# Altium PCB BaseCircuit.PcbDoc
Units mil, origin at the board's own origin, x right, y up, seen from the top; angles counter-clockwise.
Board outline 6000 x 4000 mil, 2 copper layers (Top Layer, Bottom Layer); 21 components, 10 nets, 205 pads, 0 vias.
Unrouted connection lines stored in the file: 26.
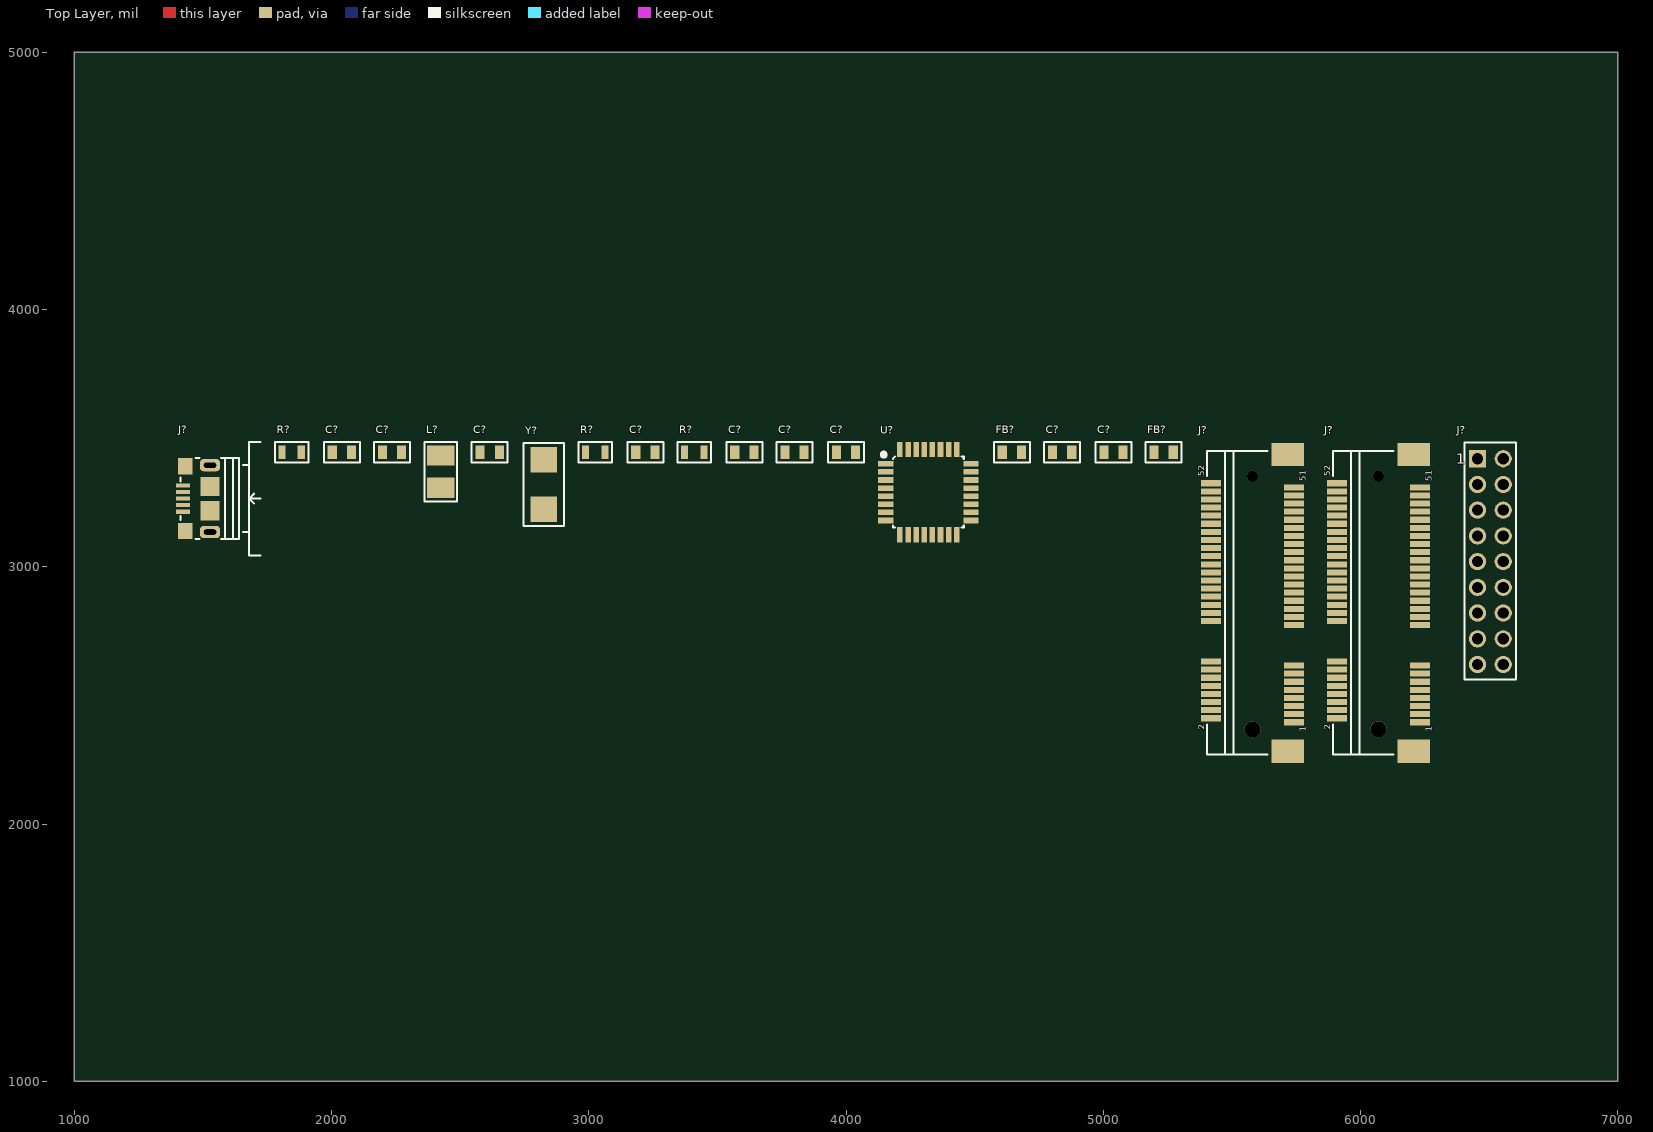
[diagram p0: Top Layer view]
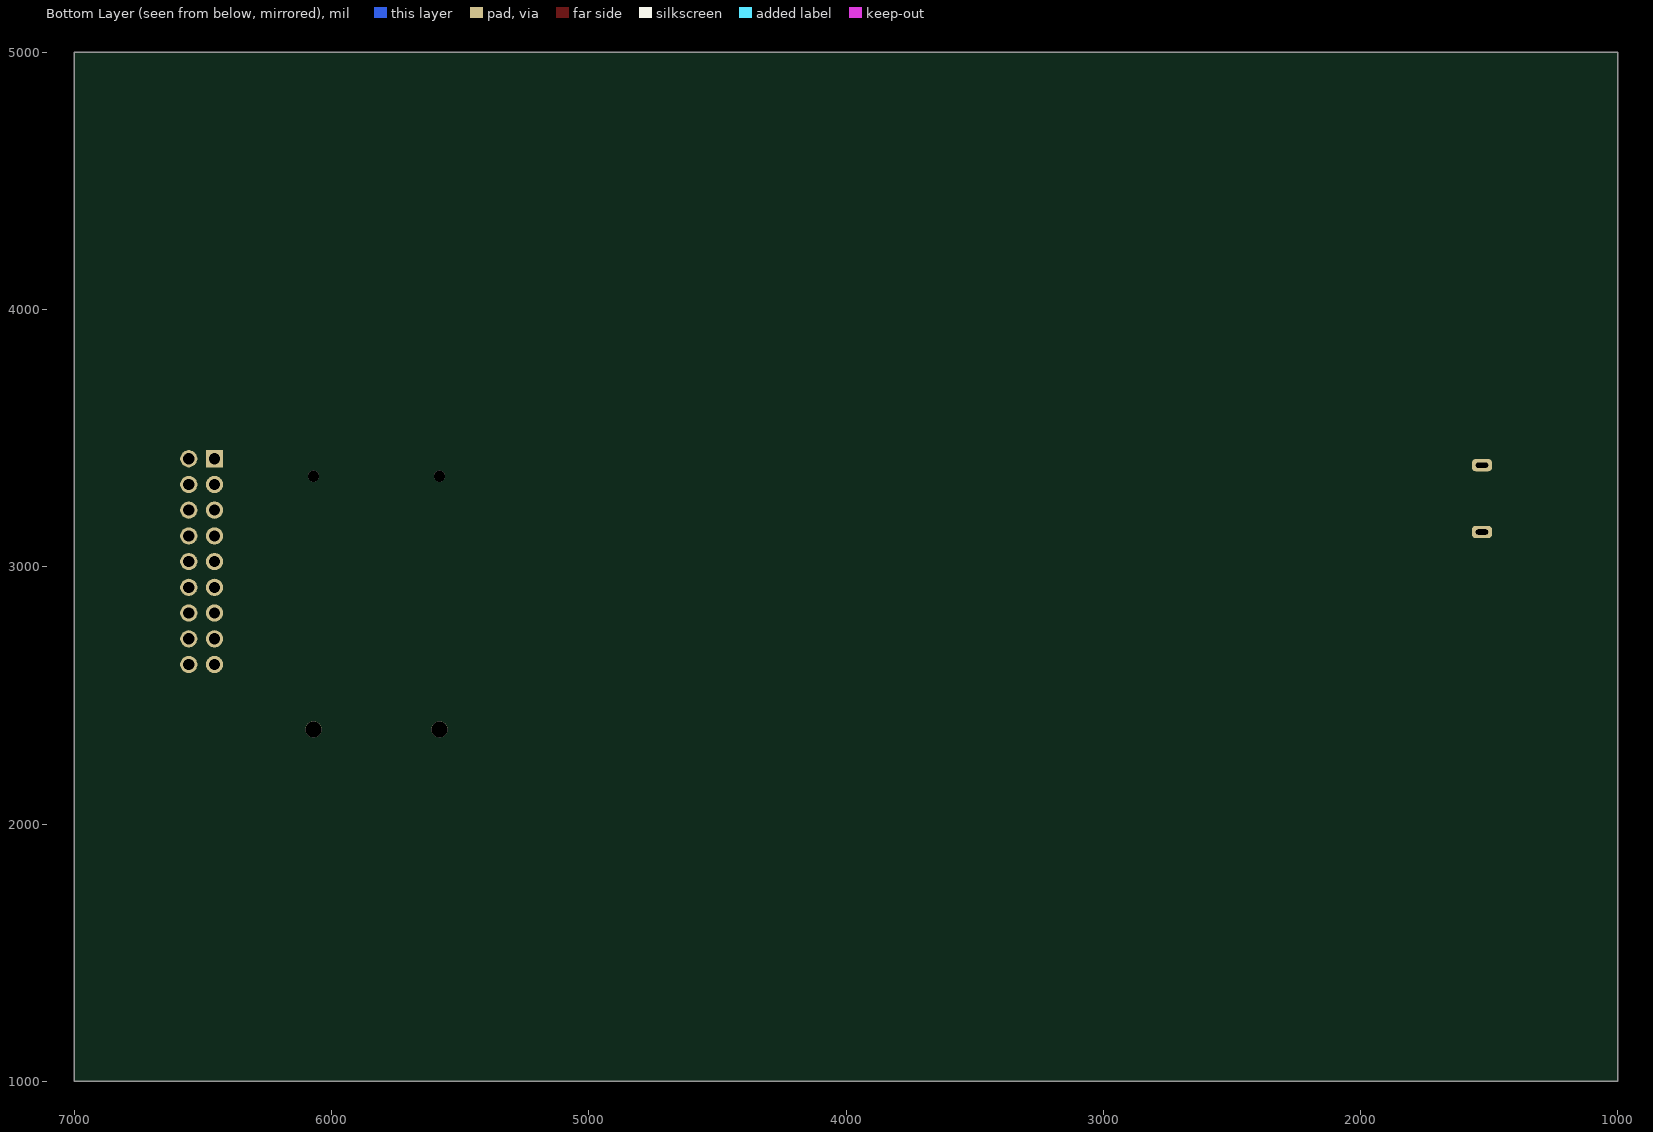
[diagram p1: Bottom Layer view, seen from below]

## Layer stack, top to bottom
Top Solder: solder mask 0.4, Solder Resist, Dk 3.5
Top Layer: signal copper 1.4
Dielectric 1: dielectric 12.6, FR-4, Dk 4.8
Bottom Layer: signal copper 1.4
Bottom Solder: solder mask 0.4, Solder Resist, Dk 3.5

## Board outline
1000,1000 7000,1000 7000,5000 1000,5000

## Design rules (kind name [scope] priority, off if disabled: settings)
Clearance [All] p1: gap=10 ignorepadtopadclearanceinfootprint=FALSE except(0: Arc-Hole Track-Hole SMDPad-Hole THPad-Hole Via-Hole Fill-Hole Poly-Hole Region-Hole Text-Hole)
PolygonConnect [All] p1: connectstyle=Relief reliefconductorwidth=10 reliefentries=4 polygonreliefangle="90 Angle" airgapwidth=10
RoutingVias [All] p1: holewidth=28 width=50 viastyle="Through Hole" minholewidth=28 minwidth=50 maxholewidth=28 maxwidth=50
SolderMaskExpansion [All] p1: expansion=4 istentingtop=FALSE
Width [All] p1: maxlimit=10 minlimit=10 preferedwidth=10
30 further rules are at their usual default settings.

## Components (designator, comment, footprint, x,y, rotation, side; value= is the part's Value field where it differs from the comment)
C? "10uF" C0805 4840,3445 r0 top
C? "10uF" C0805 4000,3445 r0 top
C? "100uF" C0805 2040,3445 r0 top
C? "10uF" C0805 3800,3445 r0 top
C? "18pF" C0805 2615,3445 r0 top
C? "100nF" C0805 5040,3445 r0 top
C? "18pF" C0805 3220,3445 r0 top
C? "100nF" C0805 3605,3445 r0 top
C? "100uF" C0805 2235,3445 r0 top
FB? "MPZ2012S601AT000" C0805 5235,3445 r0 top
FB? "MPZ2012S601AT000" C0805 4645,3445 r0 top
J? "PPTC092LFBN-RC" HDR_2X9_2.54MM 6455,3420 r0 top
J? "1775862-2" TE_1775862-2 5580,2860 r90 top
J? "1775862-2" TE_1775862-2 6070,2860 r90 top
J? "10118193-0001LF" 10118193-0001LF 1475,3265 r90 top
L? "2U2/2A" CL_inductor 2425,3370 r90 top
R? "0R" R0805 1845,3445 r0 top
R? "10K" R0805 3410,3445 r0 top
R? "1M" R0805 3025,3445 r0 top
U? "ATMEGA328PB-AU" TQFP_32 4320,3290 r0 top
Y? "ABM7-16.000MHZ-D2Y-T" ABM4_v1_1_BIG 2825,3320 r90 top

## Footprints (in the part's own frame and the unit in brackets; to place one, negate y for a bottom-side part, rotate by r counter-clockwise, add the part's x,y. Pads: shape width x height; smd on the part's side, far side on the other; paste and mask are expansions set on the pad)
10118193-0001LF [mm]
  rect 0.4x1.35 smd mask+0.05: 1(-1.3,1.338) 2(-0.65,1.338) 3(0,1.338) 4(0.65,1.338) 5(1.3,1.338)
  rect 1.6x1.4 smd: 6(-3.2,1.112) 7(3.2,1.112)
  rrect60% 1.2x2 hole 0.5 slot 1.2 at 90 deg mask+0.05: 8(-3.3,-1.338) 9(3.3,-1.338)
  rect 1.9x1.9 smd: 10(-1.2,-1.338) 11(1.2,-1.338)
  silkscreen extent -5.6,-6.3 5.6,1.6, body extent -3.93,-4.2 3.93,1.58, height 2.88
ABM4_v1_1_BIG [mm]
  rect 2.5x2.6 smd: 1(-2.45,0) 2(2.45,0)
  silkscreen extent -4.1,-2 4.1,2, body extent -3.1,-1.85 3.1,1.85, height 1.41
C0805 [mm]
  rect 0.9x1.3 smd: 1(-0.95,0) 2(0.95,0)
  silkscreen extent -1.78,-1.02 1.78,1.02, body extent -1.15,-0.51 1.15,0.49, height 1.53
CL_inductor [mm]
  rect 2x2.7 smd: 1(-1.6,0) 2(1.6,0)
  silkscreen extent -2.95,-1.6 2.9,1.6, body extent -1.7,-1.25 1.7,1.25, height 2.7
HDR_2X9_2.54MM [mm]
  rect 1.7x1.7 hole 1.1: 1(0,0)
  round 1.7 hole 1.1: 2(0,-2.54) 3(0,-5.08) 4(0,-7.62) 5(0,-10.16) 6(0,-12.7) 7(0,-15.24) 8(0,-17.78) 9(0,-20.32) 10(2.54,-20.32) 11(2.54,-17.78) 12(2.54,-15.24) 13(2.54,-12.7) 14(2.54,-10.16) 15(2.54,-7.62) 16(2.54,-5.08) 17(2.54,-2.54) 18(2.54,0)
  silkscreen extent -1.3,-21.8 3.8,1.6, body extent -1.3,-21.77 3.78,1.6, height 8.51
R0805 [mm]
  rect 0.7x1.3 smd: 1(-0.95,0) 2(0.95,0)
  silkscreen extent -1.65,-1.02 1.65,1.02, body extent -1,-0.6 1,0.6, height 0.7
TE_1775862-2 [mm]
  rect 0.6x2 smd: 1(-11.8,-4.1) 2(-11.4,4.1) 3(-11,-4.1) 4(-10.6,4.1) 5(-10.2,-4.1) 6(-9.8,4.1) 7(-9.4,-4.1) 8(-9,4.1) 9(-8.6,-4.1) 10(-8.2,4.1) 11(-7.8,-4.1) 12(-7.4,4.1) 13(-7,-4.1) 14(-6.6,4.1) 15(-6.2,-4.1) 16(-5.8,4.1) 17(-2.2,-4.1) 18(-1.8,4.1) 19(-1.4,-4.1) 20(-1,4.1) 21(-0.6,-4.1) 22(-0.2,4.1) 23(0.2,-4.1) 24(0.6,4.1) 25(1,-4.1) 26(1.4,4.1) 27(1.8,-4.1) 28(2.2,4.1) 29(2.6,-4.1) 30(3,4.1) 31(3.4,-4.1) 32(3.8,4.1) 33(4.2,-4.1) 34(4.6,4.1) 35(5,-4.1) 36(5.4,4.1) 37(5.8,-4.1) 38(6.2,4.1) 39(6.6,-4.1) 40(7,4.1) 41(7.4,-4.1) 42(7.8,4.1) 43(8.2,-4.1) 44(8.6,4.1) 45(9,-4.1) 46(9.4,4.1) 47(9.8,-4.1) 48(10.2,4.1) 49(10.6,-4.1) 50(11,4.1) 51(11.4,-4.1) 52(11.8,4.1)
  rect 2.3x3.2 smd: P1(-14.65,-3.5) P2(14.65,-3.5)
  round 1.6 hole 1.6 unplated: ""(-12.5,0)
  round 1.1 hole 1.1 unplated: ""(12.5,0)
  silkscreen extent -15,-1.5 15,4.5, body extent -14.85,-4.58 15.05,4.5, height 5.15
TQFP_32 [mm]
  rect 1.5x0.55 smd mask+0.06: 1(-4.2,2.8) 2(-4.2,2) 3(-4.2,1.2) 4(-4.2,0.4) 5(-4.2,-0.4) 6(-4.2,-1.2) 7(-4.2,-2) 8(-4.2,-2.8) 17(4.2,-2.8) 18(4.2,-2) 19(4.2,-1.2) 20(4.2,-0.4) 21(4.2,0.4) 22(4.2,1.2) 23(4.2,2) 24(4.2,2.8)
  rect 0.55x1.5 smd mask+0.06: 9(-2.8,-4.2) 10(-2,-4.2) 11(-1.2,-4.2) 12(-0.4,-4.2) 13(0.4,-4.2) 14(1.2,-4.2) 15(2,-4.2) 16(2.8,-4.2) 25(2.8,4.2) 26(2,4.2) 27(1.2,4.2) 28(0.4,4.2) 29(-0.4,4.2) 30(-1.2,4.2) 31(-2,4.2) 32(-2.8,4.2)
  silkscreen extent -4.54,-3.5 3.5,3.84, body extent -4.6,-4.6 4.6,4.6, height 1.2

## Part data
C? C? C?: library part CGA4J3X7S1A106M125AB, "Cap Ceramic 10uF 10V X7S 20% Pad SMD 0805 125°C Low ESR Automotive T/R", Case Code (Imperial)=0805, Case Code (Metric)=2012, Dielectric=X7S, Manufacturer=TDK, Max Operating Temperature=125°C, Min Operating Temperature=-55°C, Package Quantity=2000, Ratings=AEC-Q200, Supplier Part Number 1=445-16115-1-ND, Tolerance=20%, Voltage Rating=10V, Capacitance=10uF, Case/Package=0805, Category="Ceramic Capacitors", ComponentLink1Description=http://www.mouser.com/ds/2/400/lcc_automotive_general_en-843974.pdf?src-supplier=Mouser, ComponentLink1URL=http://www.mouser.com/ds/2/400/lcc_automotive_general_en-843974.pdf?src-supplier=Mouser, ComponentLink2Description=https://product.tdk.com/info/en/documents/chara_sheet/CGA4J3X7S1A106M125AB.pdf?src-supplier=Digi-Key, ComponentLink2URL=https://product.tdk.com/info/en/documents/chara_sheet/CGA4J3X7S1A106M125AB.pdf?src-supplier=Digi-Key, Height=1.25mm, Length=0.079inch, Manufacturer Part Number=CGA4J3X7S1A106M125AB, Mount="Surface Mount", Packaging="Tape and Reel", Pricing 1="1=0.45000, 10=0.31600, 50=0.23880, 100=0.20790, 500=0.15400, 1000=0.13090 (USD)", RoHS=Yes, RoHS Compliant=Yes, Stock 1=10, Supplier 1=Digi-Key, Termination=SMD/SMT, Thickness=0.057inch, Voltage Rating (DC)=10V, Weight=0.000194oz, Width=1.25mm
C? C?: library part GRM21BR60J107ME15L, "0805 100 uF 6.3 V ±20% Tolerance X5R Multilayer Ceramic Chip Capacitor", Case Code (Imperial)=0805, Case Code (Metric)=2012, Dielectric=X5R, Manufacturer=Murata, Max Operating Temperature=85°C, Min Operating Temperature=-55°C, Supplier Part Number 1=490-13981-1-ND, Tolerance=20%, Voltage Rating=6.3V, Capacitance=100uF, Case/Package=0805, Category="Ceramic Capacitors", ComponentLink1Description=http://www.farnell.com/datasheets/1957830.pdf?src-supplier=Farnell, ComponentLink1URL=http://www.farnell.com/datasheets/1957830.pdf?src-supplier=Farnell, ComponentLink2Description=http://www.farnell.com/datasheets/1957830.pdf?src-supplier=Element14, ComponentLink2URL=http://www.farnell.com/datasheets/1957830.pdf?src-supplier=Element14, ComponentLink3Description=https://search.murata.co.jp/Ceramy/image/img/A01X/G101/ENG/GRM21BR60J107ME15-01.pdf?src-supplier=Digi-Key, ComponentLink3URL=https://search.murata.co.jp/Ceramy/image/img/A01X/G101/ENG/GRM21BR60J107ME15-01.pdf?src-supplier=Digi-Key, ComponentLink4Description=http://www.farnell.com/datasheets/1957830.pdf?src-supplier=Newark, ComponentLink4URL=http://www.farnell.com/datasheets/1957830.pdf?src-supplier=Newark, Lead Free="Lead Free", Length=0.079inch, Manufacturer Part Number=GRM21BR60J107ME15L, Mount="Surface Mount", Packaging="Cut Tape", Pricing 1="1=1.15000, 10=0.90900, 50=0.78800, 100=0.68180, 500=0.51516, 1000=0.45456 (USD)", Reach SVHC Compliant=Yes, RoHS=Yes, RoHS Compliant=Yes, Series=GRM, Stock 1=830718, Supplier 1=Digi-Key, Thickness=0.057inch, Voltage Rating (DC)=6.3V, Width=0.049inch
C? C?: library part C0805C180J5GACTU, "Cap Ceramic 18pF 50V C0G 5% SMD 0805 125C Paper T/R", Case Code (Imperial)=0805, Case Code (Metric)=2012, Dielectric=C0G, Dielectric Material=Ceramic, Manufacturer=KEMET, Max Operating Temperature=125°C, Min Operating Temperature=-55°C, Package Quantity=1, Supplier Part Number 1=399-C0805C180J5GAC7800CT-ND, Temperature Coefficient=30ppm/°C, Tolerance=5%, Voltage=50V, Capacitance=18pF, Case/Package=0805, Category="Ceramic Capacitors", ComponentLink1Description=https://datasheet.ciiva.com/22746/1769375-22746770.pdf?src-supplier=Element14, ComponentLink1URL=https://datasheet.ciiva.com/22746/1769375-22746770.pdf?src-supplier=Element14, ComponentLink2Description=https://datasheet.ciiva.com/26923/getdatasheetpartid-759702-26923980.pdf?src-supplier=Verical, ComponentLink2URL=https://datasheet.ciiva.com/26923/getdatasheetpartid-759702-26923980.pdf?src-supplier=Verical, ComponentLink3Description=https://datasheet.ciiva.com/26847/getdatasheetpartid-385668-26847862.pdf?src-supplier=Verical, ComponentLink3URL=https://datasheet.ciiva.com/26847/getdatasheetpartid-385668-26847862.pdf?src-supplier=Verical, Construction=Flat, Contact Material=Tin, Contact Plating=Tin,Matte, Depth=1.25mm, Dissipation Factor=0.1%, Height=0.78mm, Lead Free="Lead Free", Lead Pitch=0.75mm, Length=2mm, Manufacturer Part Number=C0805C180J5GACTU, Mount="Surface Mount,PCB", Number of Pins=2, Packaging="Tape and Reel", Pricing 1="1=0.12000, 10=0.08600, 50=0.04900, 100=0.04070, 500=0.02852, 1000=0.02361 (USD)", Radiation Hardening=No, REACH SVHC="No SVHC", RoHS=Yes, RoHS Compliant=Yes, Series=C, Stock 1=100835, Supplier 1=Digi-Key, Termination=SMD/SMT, Thickness=0.035inch, Voltage Rating=50V, Voltage Rating (DC)=50V, Width=1.2mm
C? C?: library part CGA4J2X7R1H104K125AM, "Cap Ceramic 0.1uF 50V X7R 10% Pad SMD 0805 125°C Automotive T/R", Case Code (Imperial)=0805, Case Code (Metric)=2012, Dielectric=X7R, Manufacturer=TDK, Max Operating Temperature=125°C, Min Operating Temperature=-55°C, Package Quantity=1, Ratings=AEC-Q200, Resistor Type=Ceramic, Supplier Part Number 1=445-6958-1-ND, Tolerance=10%, Voltage Rating=50V, Capacitance=100nF, Case/Package=0805, Category="Ceramic Capacitors", ComponentLink1Description=http://components.arrow.com/part/dataview/0323_06888403?src-supplier=Arrow+Europe, ComponentLink1URL=http://components.arrow.com/part/dataview/0323_06888403?src-supplier=Arrow+Europe, ComponentLink2Description=https://product.tdk.com/info/en/catalog/datasheets/mlcc_automotive_openmode_en.pdf?src-supplier=Digi-Key, ComponentLink2URL=https://product.tdk.com/info/en/catalog/datasheets/mlcc_automotive_openmode_en.pdf?src-supplier=Digi-Key, ComponentLink3Description=https://product.tdk.com/info/en/documents/chara_sheet/CGA4J2X7R1H104K125AM.pdf?src-supplier=Digi-Key, ComponentLink3URL=https://product.tdk.com/info/en/documents/chara_sheet/CGA4J2X7R1H104K125AM.pdf?src-supplier=Digi-Key, ComponentLink4Description=http://components.arrow.com/part/dataview/57437351S460182N1165?src-supplier=Arrow+Electronics, ComponentLink4URL=http://components.arrow.com/part/dataview/57437351S460182N1165?src-supplier=Arrow+Electronics, Depth=1.25mm, Features="Soft Termination", Height=1.25mm, Length=0.079inch, Manufacturer Part Number=CGA4J2X7R1H104K125AM, Mount="Surface Mount", Packaging="Tape and Reel", Pricing 1="1=0.20000, 10=0.14200, 50=0.08080, 100=0.06700, 500=0.04696, 1000=0.03888 (USD)", RoHS=Yes, RoHS Compliant=Yes, Series=CGA, Stock 1=4940, Supplier 1=Digi-Key, Termination=SMD/SMT, Thickness=0.057inch, Voltage Rating (DC)=50V, Weight=0.000194oz, Width=0.049inch
FB? FB?: "Ferrite Beads Multi-Layer Power 600Ohm 25% 100MHz 2A 100mOhm DCR 0805 T/R", Case Code (Imperial)=0805, Case Code (Metric)=2012, Current Rating=2A, DC Resistance (DCR)=100mR, Manufacturer=TDK, Package Quantity=1, Supplier Part Number 1=445-2206-6-ND, Case/Package=0805, Category="Ferrite Beads and Chips", ComponentLink1Description=https://datasheet.ciiva.com/46634/beads-commercial-power-mpz-en-46634377.pdf?src-supplier=Digi-Key, ComponentLink1URL=https://datasheet.ciiva.com/46634/beads-commercial-power-mpz-en-46634377.pdf?src-supplier=Digi-Key, ComponentLink2Description=https://datasheet.ciiva.com/46634/beads-commercial-power-mpz-en-46634606.pdf?src-supplier=Digi-Key, ComponentLink2URL=https://datasheet.ciiva.com/46634/beads-commercial-power-mpz-en-46634606.pdf?src-supplier=Digi-Key, ComponentLink3Description=https://datasheet.ciiva.com/46634/beads-commercial-power-mpz-en-46634335.pdf?src-supplier=Digi-Key, ComponentLink3URL=https://datasheet.ciiva.com/46634/beads-commercial-power-mpz-en-46634335.pdf?src-supplier=Digi-Key, Height=0.041inch, Impedance=600R, Lead Free="Lead Free", Length=0.079inch, Manufacturer Part Number=MPZ2012S601AT000, Max DC Current=2A, Mount="Surface Mount", Packaging="Tape and Reel", Pricing 1="1=0.12000, 10=0.10100, 25=0.09040, 50=0.06640, 100=0.05740, 250=0.04528, 500=0.03824, 1000=0.03221 (USD)", REACH SVHC="No SVHC", RoHS=Yes, RoHS Compliant=Yes, Series=MPZ, Supplier 1=Digi-Key, Width=0.049inch
J?: "Connector Header 18 Position 0.100\" (2.54mm) Tin Through Hole", Manufacturer=Sullins, Supplier Part Number 1=S7077-ND, Category=Connectors, ComponentLink1Description=https://media.digikey.com/pdf/Data%20Sheets/Sullins%20PDFs/Female_Headers.100_DS.pdf?src-supplier=Digi-Key, ComponentLink1URL=https://media.digikey.com/pdf/Data%20Sheets/Sullins%20PDFs/Female_Headers.100_DS.pdf?src-supplier=Digi-Key, Manufacturer Part Number=PPTC092LFBN-RC, Pricing 1="1=1.09000, 10=0.91900, 80=0.82563, 440=0.67555, 1000=0.60048, 5000=0.54210 (USD)", RoHS=Yes, Stock 1=15534, Supplier 1=Digi-Key
J? J?: "MSATA/MINI PCI-E 5.2H TYPE I G/F", Manufacturer="TE Connectivity", Supplier Part Number 1=2411326P, Category="Card Edge Connectors", ComponentLink1Description=http://components.arrow.com/part/dataview/47764795S8999339N5665?src-supplier=Arrow+Electronics, ComponentLink1URL=http://components.arrow.com/part/dataview/47764795S8999339N5665?src-supplier=Arrow+Electronics, ComponentLink2Description=http://www.farnell.com/datasheets/2645681.pdf?src-supplier=Farnell, ComponentLink2URL=http://www.farnell.com/datasheets/2645681.pdf?src-supplier=Farnell, ComponentLink3Description=http://www.onlinecomponents.com/datasheet/17758622.aspx?p=10266609&src-supplier=Onlinecomponents.com, ComponentLink3URL=http://www.onlinecomponents.com/datasheet/17758622.aspx?p=10266609&src-supplier=Onlinecomponents.com, ComponentLink4Description=https://www.te.com/commerce/DocumentDelivery/DDEController?Action=srchrtrv&amp;DocNm=8-1773459-7_EXPRESS_MINI_CARD_QRG&amp;DocType=DS&amp;DocLang=English&src-supplier=Digi-Key, ComponentLink4URL=https://www.te.com/commerce/DocumentDelivery/DDEController?Action=srchrtrv&amp;DocNm=8-1773459-7_EXPRESS_MINI_CARD_QRG&amp;DocType=DS&amp;DocLang=English&src-supplier=Digi-Key, ComponentLink5Description=https://www.te.com/commerce/DocumentDelivery/DDEController?Action=srchrtrv&DocNm=1775862&DocType=Customer+Drawing&DocLang=English&src-supplier=Digi-Key, ComponentLink5URL=https://www.te.com/commerce/DocumentDelivery/DDEController?Action=srchrtrv&DocNm=1775862&DocType=Customer+Drawing&DocLang=English&src-supplier=Digi-Key, ComponentLink6Description=http://www.te.com/commerce/DocumentDelivery/DDEController?Action=showdoc&DocId=Data+Sheet8-1773459-7_EXPRESS_MINI_CARD_QRG1011pdfEnglishENG_DS_8-1773459-7_EXPRESS_MINI_CARD_QRG_1011.pdf&src-supplier=Avnet, ComponentLink6URL=http://www.te.com/commerce/DocumentDelivery/DDEController?Action=showdoc&DocId=Data+Sheet8-1773459-7_EXPRESS_MINI_CARD_QRG1011pdfEnglishENG_DS_8-1773459-7_EXPRESS_MINI_CARD_QRG_1011.pdf&src-supplier=Avnet, ComponentLink7Description=http://www.farnell.com/datasheets/2645681.pdf?src-supplier=Newark, ComponentLink7URL=http://www.farnell.com/datasheets/2645681.pdf?src-supplier=Newark, ComponentLink8Description=http://www.farnell.com/datasheets/2645681.pdf?src-supplier=Element14, ComponentLink8URL=http://www.farnell.com/datasheets/2645681.pdf?src-supplier=Element14, Manufacturer Part Number=1775862-2, Pricing 1="50=0.50600, 100=0.45800, 250=0.41400 (GBP)", RoHS=Yes, Stock 1=6580, Supplier 1=RSComponents
J?: "FCI Right Angle Surface Mount Mount Female USB Connector; 100 V ac; 1.8A", Manufacturer="Amphenol ICC / FCI", Supplier Part Number 1=609-4616-1-ND, Category="USB Connectors", ComponentLink1Description=http://components.arrow.com/part/dataview/0323_04107372?src-supplier=Arrow+Europe, ComponentLink1URL=http://components.arrow.com/part/dataview/0323_04107372?src-supplier=Arrow+Europe, ComponentLink2Description=http://uk.rs-online.com/webdocs/1450/0900766b814507f1.pdf?src-supplier=RSComponents, ComponentLink2URL=http://uk.rs-online.com/webdocs/1450/0900766b814507f1.pdf?src-supplier=RSComponents, ComponentLink3Description=https://cdn.amphenol-icc.com/media/wysiwyg/files/documentation/datasheet/inputoutput/io_usb_micro.pdf?src-supplier=Avnet, ComponentLink3URL=https://cdn.amphenol-icc.com/media/wysiwyg/files/documentation/datasheet/inputoutput/io_usb_micro.pdf?src-supplier=Avnet, ComponentLink4Description=https://cdn.amphenol-icc.com/media/wysiwyg/files/documentation/datasheet/inputoutput/io_usb_micro.pdf?src-supplier=Arrow+Electronics, ComponentLink4URL=https://cdn.amphenol-icc.com/media/wysiwyg/files/documentation/datasheet/inputoutput/io_usb_micro.pdf?src-supplier=Arrow+Electronics, ComponentLink5Description=https://cdn.amphenol-icc.com/media/wysiwyg/files/documentation/datasheet/inputoutput/io_usb_micro.pdf?src-supplier=Onlinecomponents.com, ComponentLink5URL=https://cdn.amphenol-icc.com/media/wysiwyg/files/documentation/datasheet/inputoutput/io_usb_micro.pdf?src-supplier=Onlinecomponents.com, ComponentLink6Description=https://cdn.amphenol-icc.com/media/wysiwyg/files/documentation/datasheet/inputoutput/io_usb_micro.pdf?src-supplier=Verical, ComponentLink6URL=https://cdn.amphenol-icc.com/media/wysiwyg/files/documentation/datasheet/inputoutput/io_usb_micro.pdf?src-supplier=Verical, ComponentLink7Description=http://www.amphenol-icc.com/media/wysiwyg/files/drawing/10118193.pdf?src-supplier=Digi-Key, ComponentLink7URL=http://www.amphenol-icc.com/media/wysiwyg/files/drawing/10118193.pdf?src-supplier=Digi-Key, ComponentLink8Description=https://cdn.amphenol-icc.com/media/wysiwyg/files/documentation/datasheet/inputoutput/io_usb_micro.pdf?src-supplier=Digi-Key, ComponentLink8URL=https://cdn.amphenol-icc.com/media/wysiwyg/files/documentation/datasheet/inputoutput/io_usb_micro.pdf?src-supplier=Digi-Key, ComponentLink9Description=https://cdn.amphenol-icc.com/media/wysiwyg/files/documentation/datasheet/inputoutput/io_usb_micro.pdf?src-supplier=Mouser, ComponentLink9URL=https://cdn.amphenol-icc.com/media/wysiwyg/files/documentation/datasheet/inputoutput/io_usb_micro.pdf?src-supplier=Mouser, ComponentLink10Description=https://cdn.amphenol-icc.com/media/wysiwyg/files/documentation/datasheet/inputoutput/io_usb_micro.pdf?src-supplier=Allied+Electronics, ComponentLink10URL=https://cdn.amphenol-icc.com/media/wysiwyg/files/documentation/datasheet/inputoutput/io_usb_micro.pdf?src-supplier=Allied+Electronics, ComponentLink11Description=https://cdn.amphenol-icc.com/media/wysiwyg/files/documentation/datasheet/inputoutput/io_usb_micro.pdf?src-supplier=RSComponents, ComponentLink11URL=https://cdn.amphenol-icc.com/media/wysiwyg/files/documentation/datasheet/inputoutput/io_usb_micro.pdf?src-supplier=RSComponents, ComponentLink12Description=https://cdn.amphenol-icc.com/media/wysiwyg/files/documentation/datasheet/inputoutput/io_usb_micro.pdf?src-supplier=TTI, ComponentLink12URL=https://cdn.amphenol-icc.com/media/wysiwyg/files/documentation/datasheet/inputoutput/io_usb_micro.pdf?src-supplier=TTI, ComponentLink13Description=https://cdn.amphenol-icc.com/media/wysiwyg/files/documentation/datasheet/inputoutput/io_usb_micro.pdf?src-supplier=TME, ComponentLink13URL=https://cdn.amphenol-icc.com/media/wysiwyg/files/documentation/datasheet/inputoutput/io_usb_micro.pdf?src-supplier=TME, ComponentLink14Description=https://cdn.amphenol-icc.com/media/wysiwyg/files/documentation/datasheet/inputoutput/io_usb_micro.pdf?src-supplier=Heilind+Electronics, ComponentLink14URL=https://cdn.amphenol-icc.com/media/wysiwyg/files/documentation/datasheet/inputoutput/io_usb_micro.pdf?src-supplier=Heilind+Electronics, Manufacturer Part Number=10118193-0001LF, Pricing 1="1=0.48000, 10=0.42000, 25=0.38440, 50=0.36160, 100=0.34660, 250=0.31640, 500=0.30136 (USD)", RoHS=No, Stock 1=101220, Supplier 1=Digi-Key
L?: library part L1210R2R2MDWIT, "Inductor RF Chip Wirewound 2.2uH 20% 100KHz 1.13A 0.104Ohm DCR 1210 T/R", Case Code (Imperial)=1210, Case Code (Metric)=3225, Current Rating=2A, DC Current=1.13A, DC Resistance (DCR)=80mR, Inductance=2.2uH, Inductance Tolerance=20%, Manufacturer=KEMET, Max Operating Temperature=105°C, Min Operating Temperature=-40°C, Package Quantity=1000, Resistor Type=Wirewound,Ceramic, Self Resonant Frequency=190MHz, Supplier Part Number 1=399-9598-1-ND, Test Frequency=100kHz, Case/Package=1210, Category="Fixed Inductors", ComponentLink1Description=https://datasheet.ciiva.com/4957/f3115-4957838.pdf?src-supplier=Mouser, ComponentLink1URL=https://datasheet.ciiva.com/4957/f3115-4957838.pdf?src-supplier=Mouser, ComponentLink2Description=https://datasheet.ciiva.com/6691/f3115-6691487.pdf?src-supplier=Digi-Key, ComponentLink2URL=https://datasheet.ciiva.com/6691/f3115-6691487.pdf?src-supplier=Digi-Key, ComponentLink3Description=https://datasheet.ciiva.com/8512/f3115-8512543.pdf?src-supplier=Avnet, ComponentLink3URL=https://datasheet.ciiva.com/8512/f3115-8512543.pdf?src-supplier=Avnet, ComponentLink4Description=https://datasheet.ciiva.com/17280/f3115-17280270.pdf?src-supplier=Avnet+Europe, ComponentLink4URL=https://datasheet.ciiva.com/17280/f3115-17280270.pdf?src-supplier=Avnet+Europe, ComponentLink5Description=https://datasheet.ciiva.com/22685/27262-22685038.pdf?src-supplier=Element14, ComponentLink5URL=https://datasheet.ciiva.com/22685/27262-22685038.pdf?src-supplier=Element14, Core Material=Ferrite, Depth=2.7mm, Height=2.5mm, Height - Seated (Max)=0.106inch, Length=0.126inch, Manufacturer Part Number=L1210R2R2MDWIT, Max DC Current=2A, Military Standard=Not, Mount="Surface Mount", Packaging="Tape and Reel", Pricing 1="1=0.50000, 10=0.43700, 25=0.40600, 50=0.34360, 100=0.31240, 250=0.29364, 500=0.26240 (USD)", Radiation Hardening=No, REACH SVHC="No SVHC", RoHS=Yes, RoHS Compliant=Yes, Series=L-DWI, Shielding=Unshielded, Stock 1=11928, Supplier 1=Digi-Key, Termination=SMD/SMT, Tolerance=20%, Width=0.098inch
R?: library part RC0805JR-070RL, "RC Series 0805 0.125 W 0 Ohm Jumper Surface Mount Thick Film Chip Resistor", Case Code (Imperial)=0805, Case Code (Metric)=2012, Manufacturer=Yageo, Max Operating Temperature=155°C, Max Power Dissipation=125mW, Min Operating Temperature=-55°C, Resistance=0mR, Resistance Tolerance=5%, Resistor Type="Thick Film", Supplier Part Number 1=311-0.0ARCT-ND, Temperature Coefficient=200ppm/°C, Voltage Rating=150V, Case/Package=0805, Category="Chip SMD Resistors", ComponentLink1Description=https://datasheet.ciiva.com/7941/1738694-7941861.pdf?src-supplier=Element14, ComponentLink1URL=https://datasheet.ciiva.com/7941/1738694-7941861.pdf?src-supplier=Element14, ComponentLink2Description=https://datasheet.ciiva.com/11819/0900766b8106beab-11819430.pdf?src-supplier=RSComponents, ComponentLink2URL=https://datasheet.ciiva.com/11819/0900766b8106beab-11819430.pdf?src-supplier=RSComponents, ComponentLink3Description=https://datasheet.ciiva.com/7941/1738694-7941862.pdf?src-supplier=Element14, ComponentLink3URL=https://datasheet.ciiva.com/7941/1738694-7941862.pdf?src-supplier=Element14, ComponentLink4Description=https://datasheet.ciiva.com/7941/1738694-7941863.pdf?src-supplier=Element14, ComponentLink4URL=https://datasheet.ciiva.com/7941/1738694-7941863.pdf?src-supplier=Element14, ComponentLink5Description=https://datasheet.ciiva.com/15190/getdatasheetpartid-330685-15190028.pdf?src-supplier=Verical, ComponentLink5URL=https://datasheet.ciiva.com/15190/getdatasheetpartid-330685-15190028.pdf?src-supplier=Verical, Construction=Rectangular, Contact Plating=Tin,Matte, Depth=1.25mm, Features="Moisture Resistant", Height=0.5mm, Lead Free="Lead Free", Length=2mm, Manufacturer Part Number=RC0805JR-070RL, Military Standard=Not, Number of Pins=2, Number of Terminations=2, Packaging="Tape and Reel", Power Rating=125mW, Pricing 1="1=0.10000, 10=0.03100, 25=0.02240, 50=0.01720, 100=0.01260, 250=0.00964, 500=0.00770, 1000=0.00567 (USD)", Radiation Hardening=No, REACH SVHC=Unknown, RoHS=Yes, RoHS Compliant=Yes, Series=RC, Size Code=0805, Stock 1=3244701, Supplier 1=Digi-Key, Technology="THICK FILM", Termination=SMD/SMT, Tolerance=5%, Voltage Rating (DC)=150V, Width=1.25mm
R?: library part RC0805FR-0710KL, "Res SMD 0805 10K 1% 0.125W T.C.100PPM", Case Code (Imperial)=0805, Case Code (Metric)=2012, Manufacturer=Yageo, Max Operating Temperature=155°C, Max Power Dissipation=125mW, Min Operating Temperature=-55°C, Package Quantity=1, Resistance=10kR, Resistance Tolerance=1%, Resistor Type="Thick Film", Supplier Part Number 1=311-10.0KCRTR-ND, Temperature Coefficient=100ppm/°C, Voltage Rating=150V, Case/Package=0805, Category="Chip SMD Resistors", Construction=Rectangular, Depth=1.25mm, Features="Moisture Resistant", Height=0.024inch, Lead Free="Lead Free", Length=2mm, Manufacturer Part Number=RC0805FR-0710KL, Military Standard=Not, Number of Terminations=2, Packaging="Tape and Reel", Power Rating=125mW, Pricing 1="5000=0.00544 (USD)", REACH SVHC=Unknown, RoHS=Yes, RoHS Compliant=Yes, Series=RC, Size Code=0805, Stock 1=1849576, Supplier 1=Digi-Key, Technology="THICK FILM", Termination=SMD/SMT, Tolerance=1%, Width=0.049inch
R?: library part RC0805FR-071ML, "Res Thick Film 0805 1M Ohm 1% 0.125W(1/8W) ±100ppm/C Pad SMD T/R", Case/Package=0805, Manufacturer="Yageo Phycomp", Max Operating Temperature=155°C, Min Operating Temperature=-55°C, Power Rating=125mW, Resistance=1MR, Supplier Part Number 1=311-1.00MCRCT-ND, Temperature Coefficient=100ppm/°C, Tolerance=1%, Voltage Rating (DC)=150V, Category="Chip SMD Resistors", ComponentLink1Description=http://www.farnell.com/datasheets/2167052.pdf?src-supplier=Farnell, ComponentLink1URL=http://www.farnell.com/datasheets/2167052.pdf?src-supplier=Farnell, ComponentLink2Description=http://www.mouser.com/ds/2/447/Yageo_08112016_RC0805-968729.pdf?src-supplier=Mouser, ComponentLink2URL=http://www.mouser.com/ds/2/447/Yageo_08112016_RC0805-968729.pdf?src-supplier=Mouser, ComponentLink3Description=http://www.farnell.com/datasheets/444164.pdf?src-supplier=Element14, ComponentLink3URL=http://www.farnell.com/datasheets/444164.pdf?src-supplier=Element14, ComponentLink4Description=http://www.farnell.com/datasheets/2167052.pdf?src-supplier=Newark, ComponentLink4URL=http://www.farnell.com/datasheets/2167052.pdf?src-supplier=Newark, ComponentLink5Description=http://www.yageo.com/documents/recent/PYu-RC_Group_51_RoHS_L_10.pdf?src-supplier=Digi-Key, ComponentLink5URL=http://www.yageo.com/documents/recent/PYu-RC_Group_51_RoHS_L_10.pdf?src-supplier=Digi-Key, Depth=1.25mm, Height=0.5mm, Lead Free="Lead Free", Length=2mm, Manufacturer Part Number=RC0805FR-071ML, Mount="Surface Mount", Number of Pins=2, Packaging="Cut Tape", Pricing 1="1=0.10000, 10=0.04200, 100=0.01690, 1000=0.00759, 2500=0.00659 (USD)", REACH SVHC="No SVHC", RoHS=Yes, Stock 1=541444, Supplier 1=Digi-Key, Width=1.25mm
U?: "IC MCU 8BIT 32KB FLASH 32TQFP", Case/Package=TQFP, Manufacturer=Microchip, Supplier Part Number 1=556-ATMEGA328PB-AU, Category=Microcontrollers, ComponentLink1Description=http://www.farnell.com/datasheets/2915218.pdf?src-supplier=Farnell, ComponentLink1URL=http://www.farnell.com/datasheets/2915218.pdf?src-supplier=Farnell, ComponentLink2Description=http://www.farnell.com/datasheets/2915218.pdf?src-supplier=Newark, ComponentLink2URL=http://www.farnell.com/datasheets/2915218.pdf?src-supplier=Newark, ComponentLink3Description=http://www.microchip.com/mymicrochip/filehandler.aspx?ddocname=en589666&src-supplier=Digi-Key, ComponentLink3URL=http://www.microchip.com/mymicrochip/filehandler.aspx?ddocname=en589666&src-supplier=Digi-Key, Manufacturer Part Number=ATMEGA328PB-AU, Pricing 1="1=1.72000, 10=1.72000, 50=1.58000, 100=1.58000, 1000=1.57000, 10000=1.57000 (USD)", RoHS=Yes, RoHS Compliant=Yes, Supplier 1=Mouser
Y?: "Crystal 16MHz ±20ppm (Tol) ±30ppm (Stability) 18pF FUND 50Ohm 2-Pin Mini-CSMD T/R", Case/Package=CSMD, ESR (Equivalent Series Resistance)=50R, Frequency=16MHz, Frequency Stability=30ppm, Frequency Tolerance=20ppm, Load Capacitance=18pF, Manufacturer=Abracon, Max Operating Temperature=85°C, Min Operating Temperature=-40°C, Package Quantity=1000, Resistor Type=Ceramic, Supplier Part Number 1=1710290, Category=Crystals, ComponentLink1Description=https://datasheet.ciiva.com/15116/getdatasheetpartid-721624-15116835.pdf?src-supplier=Verical, ComponentLink1URL=https://datasheet.ciiva.com/15116/getdatasheetpartid-721624-15116835.pdf?src-supplier=Verical, ComponentLink2Description=https://datasheet.ciiva.com/22658/947971-22658293.pdf?src-supplier=Element14, ComponentLink2URL=https://datasheet.ciiva.com/22658/947971-22658293.pdf?src-supplier=Element14, ComponentLink3Description=https://datasheet.ciiva.com/5788/abm7-5788054.pdf?src-supplier=Farnell, ComponentLink3URL=https://datasheet.ciiva.com/5788/abm7-5788054.pdf?src-supplier=Farnell, ComponentLink4Description=https://datasheet.ciiva.com/7998/947971-7998600.pdf?src-supplier=Element14, ComponentLink4URL=https://datasheet.ciiva.com/7998/947971-7998600.pdf?src-supplier=Element14, ComponentLink5Description=https://datasheet.ciiva.com/46385/947971-46385243.pdf?src-supplier=Element14, ComponentLink5URL=https://datasheet.ciiva.com/46385/947971-46385243.pdf?src-supplier=Element14, ComponentLink6Description=https://datasheet.ciiva.com/16383/abm7-16383174.pdf?src-supplier=Future+Electronics, ComponentLink6URL=https://datasheet.ciiva.com/16383/abm7-16383174.pdf?src-supplier=Future+Electronics, ComponentLink7Description=https://datasheet.ciiva.com/18649/abm7-18649865.pdf?src-supplier=Digi-Key, ComponentLink7URL=https://datasheet.ciiva.com/18649/abm7-18649865.pdf?src-supplier=Digi-Key, ComponentLink8Description=https://datasheet.ciiva.com/18649/abm7-18649866.pdf?src-supplier=Digi-Key, ComponentLink8URL=https://datasheet.ciiva.com/18649/abm7-18649866.pdf?src-supplier=Digi-Key, ComponentLink9Description=https://datasheet.ciiva.com/18649/abm7-18649867.pdf?src-supplier=Digi-Key, ComponentLink9URL=https://datasheet.ciiva.com/18649/abm7-18649867.pdf?src-supplier=Digi-Key, ComponentLink10Description=https://datasheet.ciiva.com/26941/getdatasheetpartid-719818-26941724.pdf?src-supplier=Verical, ComponentLink10URL=https://datasheet.ciiva.com/26941/getdatasheetpartid-719818-26941724.pdf?src-supplier=Verical, Depth=3.5mm, Height=0.055inch, Lead Free="Lead Free", Length=6mm, Manufacturer Part Number=ABM7-16.000MHZ-D2Y-T, Mount="Surface Mount", Number of Pins=2, Packaging="Tape and Reel", Pricing 1="1000=0.52200, 3000=0.50800 (USD)", Radiation Hardening=No, REACH SVHC=Unknown, RoHS=Yes, Stock 1=710, Supplier 1=RSComponents, Termination=SMD/SMT, Tolerance=20ppm, Width=3.3mm

## Nets (pads, with @x,y where several pads share a name; then routed paths per layer and width w, separated by ;. In a path a pad name is that pad's centre, name@x,y a point inside that pad or via, vN(x,y) a via of type N, cw(c..) or ccw(c..) an arc to the next point about the centre after c; other vN are vias at no path point)
328P_16MHz_XTAL1: C?.2@2652.4,3445 R?.1@2987.6,3445 U?.7 Y?.1
328P_16MHz_XTAL2: C?.2@3257.4,3445 R?.2@3062.4,3445 U?.8 Y?.2
328P_RESET: R?.1@3372.6,3445 U?.29
"+5 328P AVCC": C?.2@3837.4,3445 C?.2@4037.4,3445 FB?.2@4682.4,3445 U?.18
"+5 328P VCC": C?.2@4877.4,3445 C?.2@5077.4,3445 FB?.2@5272.4,3445 U?.4
+5V: C?.2@2272.4,3445 FB?.1 L?.2 R?.2@3447.4,3445
+5V_USB: C?.2@2077.4,3445 J?.1@1422.34,3213.82 L?.1
+AREF: C?.2@3642.4,3445 U?.19
GND: C?.1 J?.5@1422.34,3316.18 J?.6@1431.2,3139.02 J?.7@1431.2,3390.98 J?.8@1527.66,3135.08 J?.9@1527.66,3394.92 J?.10@1527.66,3217.76 J?.11@1527.66,3312.24 R?.2@1882.4,3445 U?.5 U?.21
NetJ?_4: J?.4@1422.34,3290.59 R?.1@1807.6,3445
pads on no net: J?. J?.1@5741.42,2395.43 J?.1@6231.42,2395.43 J?.1@6455,3420 J?.2 J?.3 J?.4@5418.58,2442.68 J?.4@5908.58,2442.68 J?.4@6455,3120 J?.5@5741.42,2458.43 J?.5@6231.42,2458.43 J?.5@6455,3020 J?.6@5418.58,2474.17 J?.6@5908.58,2474.17 J?.6@6455,2920 J?.7@5741.42,2489.92 J?.7@6231.42,2489.92 J?.7@6455,2820 J?.8@5418.58,2505.67 J?.8@5908.58,2505.67 J?.8@6455,2720 J?.9@5741.42,2521.42 J?.9@6231.42,2521.42 J?.9@6455,2620 J?.10@5418.58,2537.17 J?.10@5908.58,2537.17 J?.10@6555,2620 J?.11@5741.42,2552.91 J?.11@6231.42,2552.91 J?.11@6555,2720 J?.12 J?.13 J?.14 J?.15 J?.16 J?.17 J?.18 J?.19 J?.20 J?.21 J?.22 J?.23 J?.24 J?.25 J?.26 J?.27 J?.28 J?.29 J?.30 J?.31 J?.32 J?.33 J?.34 J?.35 J?.36 J?.37 J?.38 J?.39 J?.40 J?.41 J?.42 J?.43 J?.44 J?.45 J?.46 J?.47 J?.48 J?.49 J?.50 J?.51 J?.52 J?.P1 J?.P2 U?.1 U?.2 U?.3 U?.6 U?.9 U?.10 U?.11 U?.12 U?.13 U?.14 U?.15 U?.16 U?.17 U?.20 U?.22 U?.23 U?.24 U?.25 U?.26 U?.27 U?.28 U?.30 U?.31 U?.32

## Text inside footprints (layer, text, board x,y; h text height)
J?: Top Overlay "1" at 6372.32,3400.31 h39.37
J?: Top Overlay "2" at 5882.71,2367.13 h24.04 r90; Top Overlay "52" at 5882.73,3352.82 h24.03 r90; Top Overlay "51" at 6276.91,3332.95 h24.03 r90; Top Overlay "1" at 6276.72,2357.96 h24 r90
J?: Top Overlay "2" at 5392.71,2367.13 h24.04 r90; Top Overlay "52" at 5392.73,3352.82 h24.03 r90; Top Overlay "51" at 5786.91,3332.95 h24.03 r90; Top Overlay "1" at 5786.72,2357.96 h24 r90